# Altium PCB PCB.PcbDoc (part 2 of 2)
Units mm, origin at the board's own origin, x right, y up, seen from the top; angles counter-clockwise.
Board outline 53.34 x 28.45 mm, 2 copper layers (Top Layer, Bottom Layer), stack 1.671 mm thick; 30 components, 49 nets, 162 pads, 72 vias.
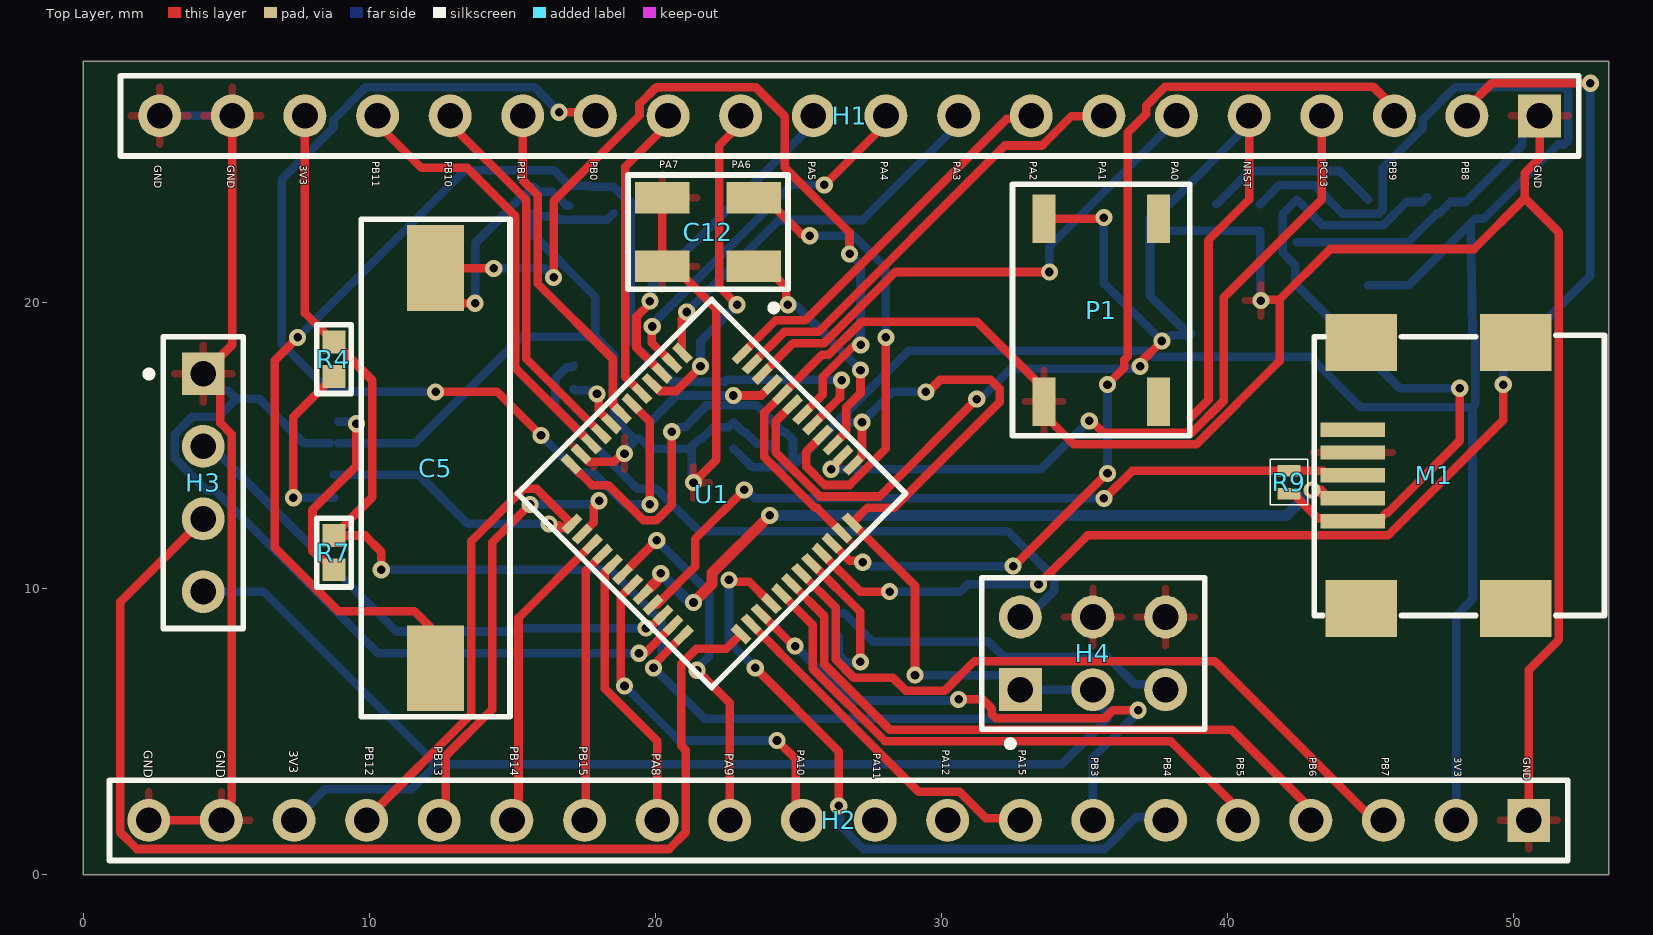
[diagram p0: Top Layer view]

## Silkscreen, mask and mechanical layers (free items; w line width, h text height) (continued)
Top Overlay: (continued)
  text "GND" at 2.112,4.365 h0.3 r270
  text "GND" at 4.652,4.365 h0.3 r270
  text "3V3" at 7.192,4.365 h0.3 r270
  text "PA10" at 24.962,4.375 h0.25 r270
  text "PA12" at 30.042,4.375 h0.25 r270
  text "PA15" at 32.709,4.375 h0.25 r270
  text "PA8" at 19.882,4.248 h0.3 r270
  text "PA9" at 22.422,4.248 h0.3 r270
  text "PA11" at 27.629,4.248 h0.25 r270
  text "PB3" at 35.249,4.121 h0.25 r270
  text "PB4" at 37.789,4.121 h0.25 r270
  text "PB5" at 40.329,4.121 h0.25 r270
  text "PB6" at 42.869,4.121 h0.25 r270
  text "PB7" at 45.409,4.121 h0.25 r270
  text "3V3" at 47.949,4.121 h0.25 r270
  text "GND" at 50.362,4.121 h0.25 r270
Board Outline:
  the board outline again, w0.2